# Altium PCB PCB.PcbDoc
Units mm, origin at the board's own origin, x right, y up, seen from the top; angles counter-clockwise.
Board outline 152.4 x 101.6 mm, 2 copper layers (Top Layer, Bottom Layer); 32 components, 25 nets, 123 pads, 0 vias.
Unrouted connection lines stored in the file: 8.
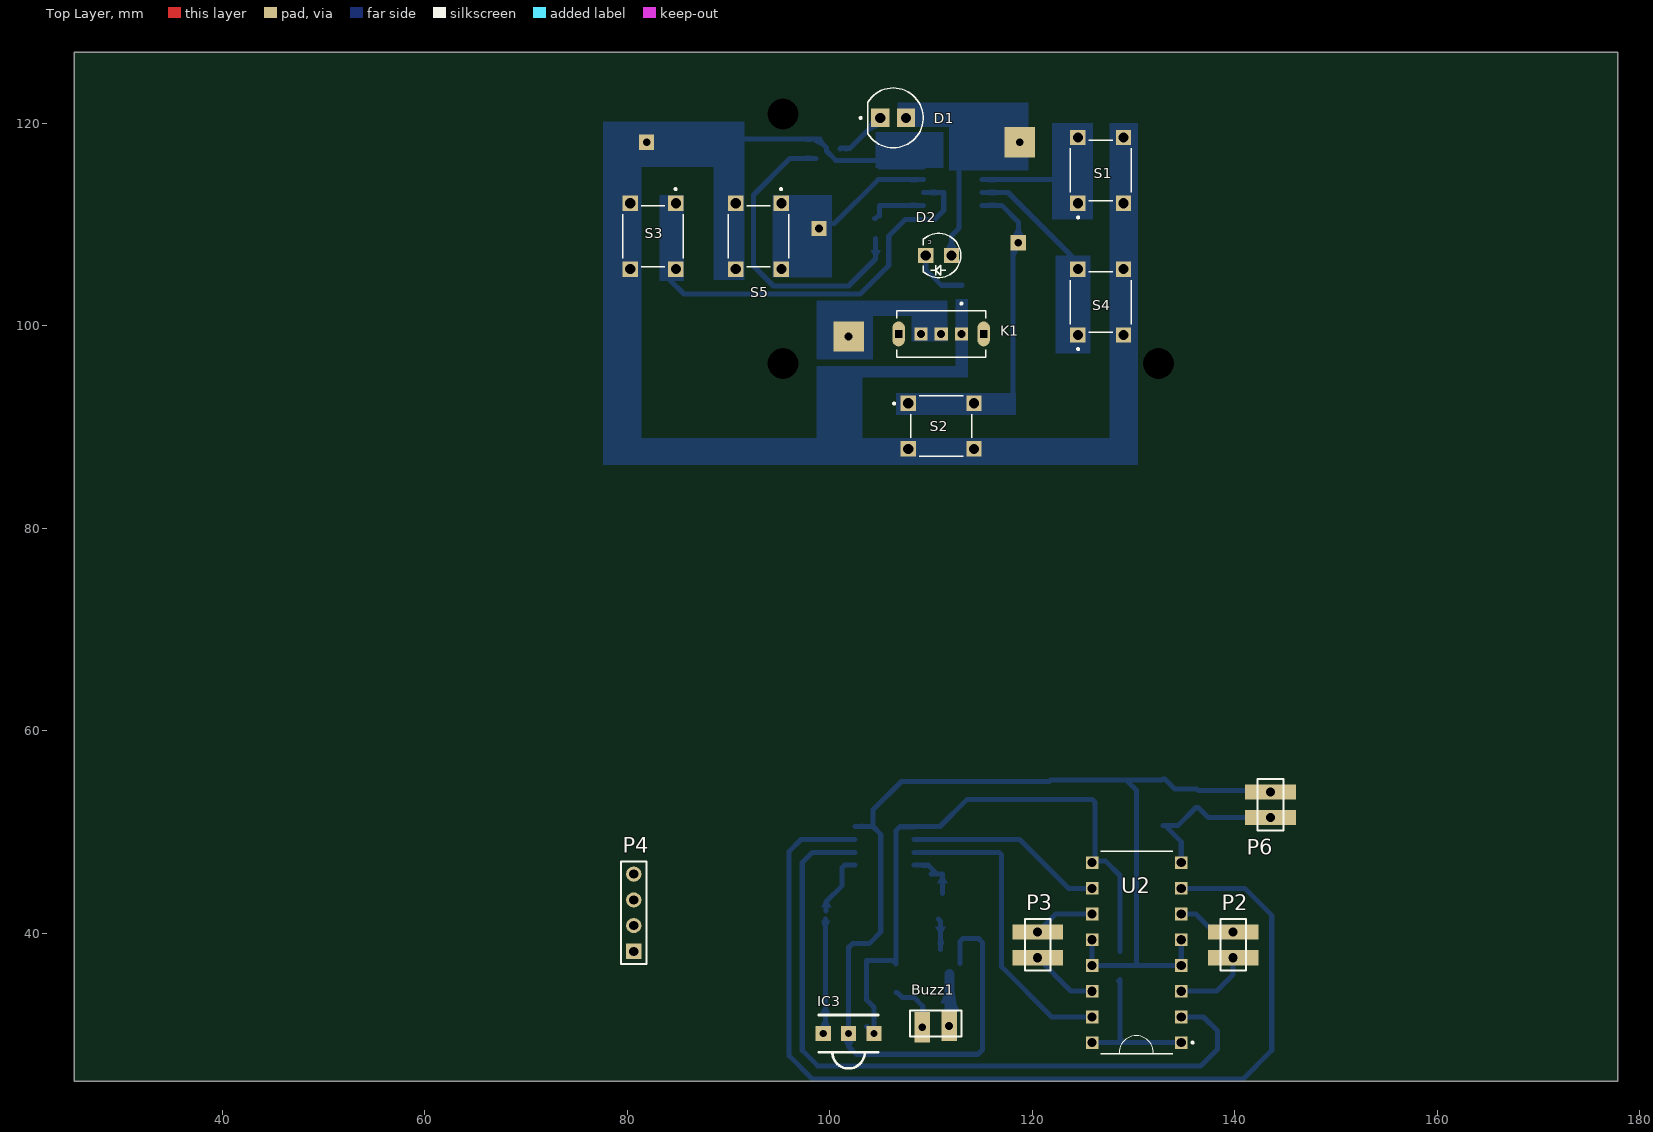
[diagram p0: Top Layer view]
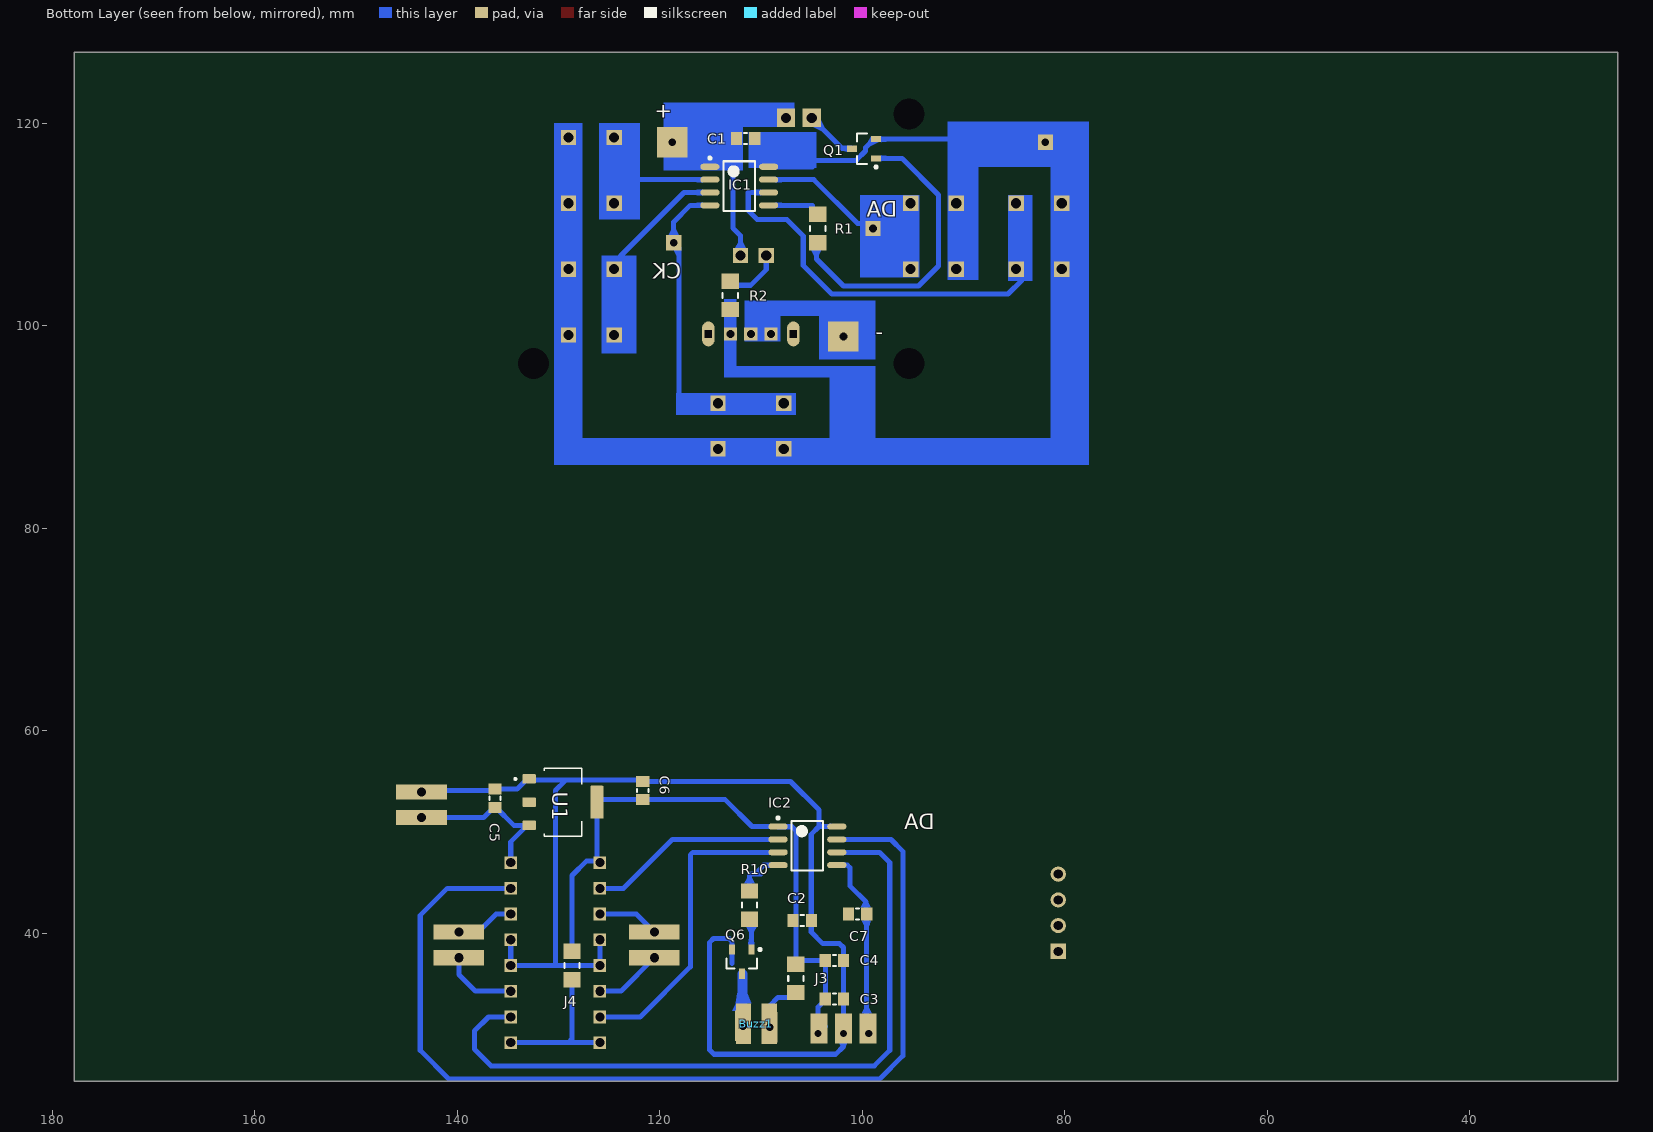
[diagram p1: Bottom Layer view, seen from below]
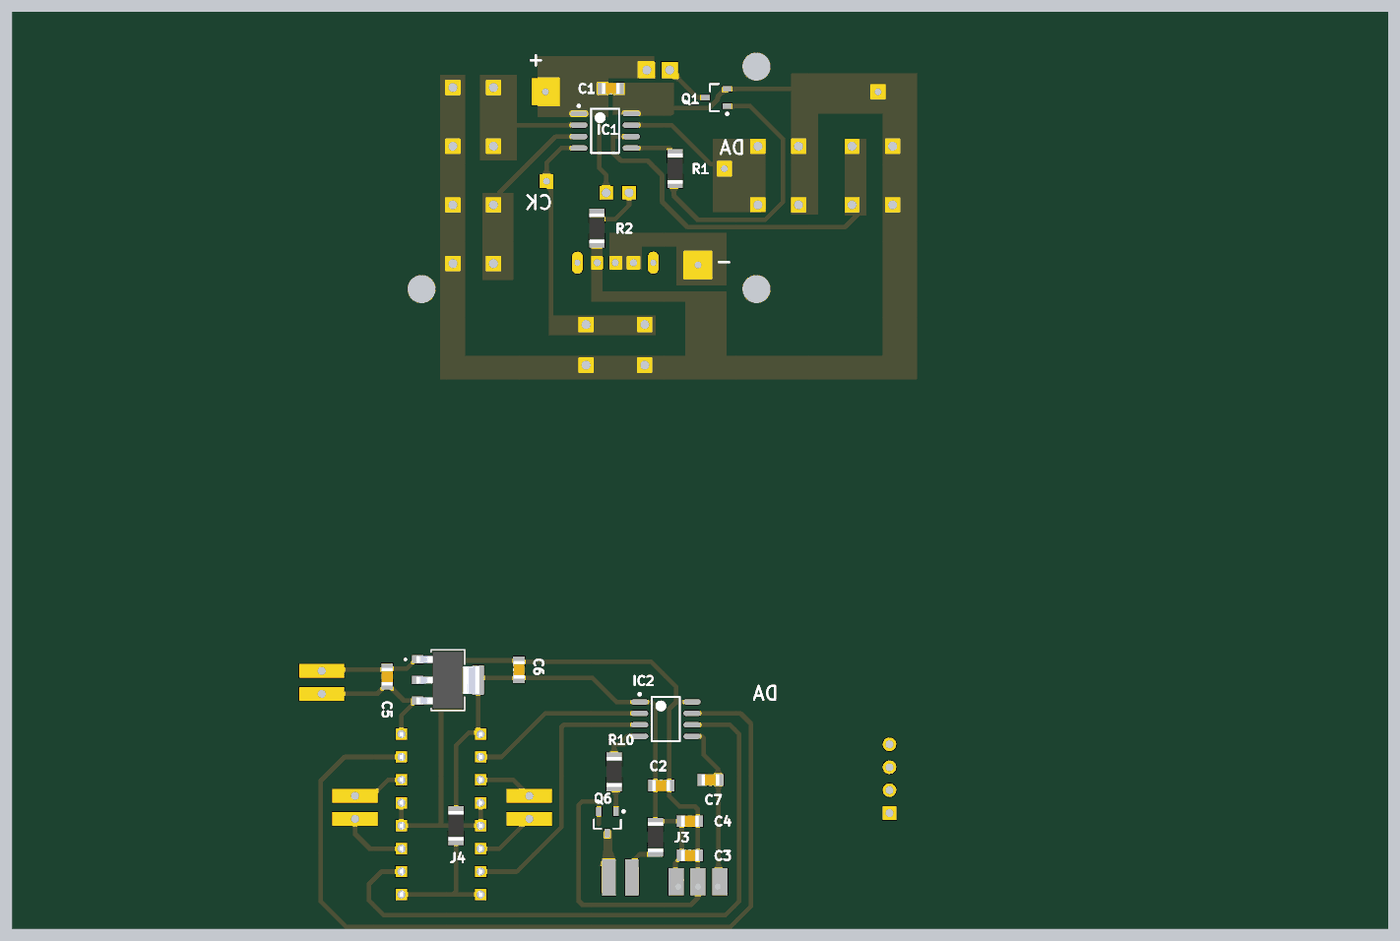
[diagram p2: 3D render of the assembled board from below, using the file's embedded part models]

## Layer stack, top to bottom
Top Solder: solder mask 0.0102, Solder Resist, Dk 3.5
Top Layer: signal copper 0.0356
Dielectric 1: dielectric 0.32, FR-4, Dk 4.8
Bottom Layer: signal copper 0.0356
Bottom Solder: solder mask 0.0102, Solder Resist, Dk 3.5

## Board outline
25.4,25.4 177.8,25.4 177.8,127 25.4,127

## Design rules (kind name [scope] priority, off if disabled: settings)
Clearance [All] p1: gap=0.3 ignorepadtopadclearanceinfootprint=FALSE
PolygonConnect [All] p1: connectstyle=Relief reliefconductorwidth=0.254 reliefentries=4 polygonreliefangle="90 Angle" airgapwidth=0.254
RoutingVias [All] p1: holewidth=0.711 width=1.27 viastyle="Through Hole" minholewidth=0.711 minwidth=1.27 maxholewidth=0.711 maxwidth=1.27
SolderMaskExpansion [All] p1: expansion=0.102
Width [All] p1: maxlimit=1 minlimit=0.254 preferedwidth=0.5
30 further rules are at their usual default settings.

## Classes and differential pairs
component class Sheet1: Buzz1 C1 C2 C3 C4 C5 C6 D1 IC1 IC2 IC3 P2 P3 P4 P6 Q1 Q6 R1 R10 S1 S2 S3 S4 S5 U1

## Components (designator, comment, footprint, x,y, rotation, side; value= is the part's Value field where it differs from the comment)
Buzz1 "Header 2" HDR1X2#1 109.18,31.097 r0 top
C1 "Capacitor" CAPC2012X08N-805 111.506,118.491 r180 bottom value=100n
C2 "Capacitor" CAPC2012X08N-805 105.918,41.275 r180 bottom value=100n
C3 "Capacitor" CAPC2012X08N-805 102.743,33.528 r180 bottom value=100u
C4 "Capacitor" CAPC2012X08N-805 102.743,37.338 r180 bottom value=100n
C5 "Capacitor" CAPC2012X08N-805 136.271,53.34 r270 bottom value=100n
C6 "Capacitor" CAPC2012X08N-805 121.666,54.102 r270 bottom value=100u
C7 "Capacitor" CAPC2012X08N-805 100.457,41.91 r180 bottom value=100n
D1 "L08R5000Q1" LEDRD254W57D500H1070 106.252,120.523 r0 top
D2 "Comment" LED-3MM-ROUND 110.744,106.934 r180 top
IC1 "HT66f002" ht66f002 112.141,113.792 r180 bottom
IC2 "HT66f002" ht66f002 105.41,48.641 r180 bottom
IC3 "VS838" VS838 101.854,30.099 r90 top
J3 "Resistor" RESC3216X08N-1206 106.553,35.56 r90 bottom value=1k
J4 "Resistor" RESC3216X08N-1206 128.651,36.83 r270 bottom value=1k
K1 "Comment" SW_SS12D07VG4 110.998,99.187 r180 top
P2 "Header 2" HDR1X2#2 139.827,37.592 r90 top
P3 "Header 2" HDR1X2#2 120.523,40.132 r270 top
P4 "Header 4" HDR1X4 80.645,38.227 r90 top
P6 "Header 2" HDR1X2#2 143.51,51.435 r90 top
Q1 "c945" c945 99.822,117.475 r0 bottom
Q6 "NPN" MMBT8050 111.887,37.211 r270 bottom
R1 "Resistor" RESC3216X08N-1206 104.394,109.601 r270 bottom value=1K
R2 "Resistor" RESC3216X08N-1206 113.03,102.997 r270 bottom value=1K
R10 "Resistor" RESC3216X08N-1206 111.125,42.799 r270 bottom value=1k
S1 "TS04-66-95-BK-100-SMT" SW_TS02-66-43-BK-160-SCR-D 126.746,115.339 r90 top
S2 "TS04-66-95-BK-100-SMT" SW_TS02-66-43-BK-160-SCR-D 110.998,90.091 r0 top
S3 "TS04-66-95-BK-100-SMT" SW_TS02-66-43-BK-160-SCR-D 82.55,108.839 r270 top
S4 "TS04-66-95-BK-100-SMT" SW_TS02-66-43-BK-160-SCR-D 126.746,102.339 r90 top
S5 "TS04-66-95-BK-100-SMT" SW_TS02-66-43-BK-160-SCR-D 92.964,108.839 r270 top
U1 "AMS1117" SOT229P700X180-4N 129.54,52.959 r180 bottom
U2 "L293D" DIP880W50P254L2000H510Q16 130.302,38.1 r180 top

## Footprints (in the part's own frame and the unit in brackets; to place one, negate y for a bottom-side part, rotate by r counter-clockwise, add the part's x,y. Pads: shape width x height; smd on the part's side, far side on the other; paste and mask are expansions set on the pad)
c945 [mm] "SOT23, 3-Leads, Body 2.90x2.45mm, Pitch 0.95mm, IPC Medium Density"
  rect 1x0.6 smd: B(-1.2,0.95) C(1.2,0) E(-1.2,-0.95)
  silkscreen extent -1.32,-1.5 0.7,1.92, body extent -0.7,-1.5 0.7,1.5, height 1.1
CAPC2012X08N-805 [mm] "Chip Capacitor, 2-Leads, Body 2.00x1.25mm, IPC Medium Density"
  rect 1.1x1.3 smd: 1(-0.9,0) 2(0.9,0)
  silkscreen extent -0.15,-0.55 0.15,0.55, body extent -1,-0.63 1,0.63, height 0.8
DIP880W50P254L2000H510Q16 [mm]
  rect 1.25x1.25 / inner round 1.25 / far side rect 1.25x1.25 hole 0.9: 1(-4.4,8.89)
  rect 1.25x1.25 hole 0.9: 2(-4.4,6.35) 3(-4.4,3.81) 4(-4.4,1.27) 5(-4.4,-1.27) 6(-4.4,-3.81) 7(-4.4,-6.35) 8(-4.4,-8.89) 9(4.4,-8.89) 10(4.4,-6.35) 11(4.4,-3.81) 12(4.4,-1.27) 13(4.4,1.27) 14(4.4,3.81) 15(4.4,6.35) 16(4.4,8.89)
  silkscreen extent -5.63,-10 3.55,10, body extent -4.62,-10 4.62,10, height 5.1
HDR1X2#1 [mm] "Connector; Header; 2 Position"
  rect 1.5x4 smd far side: 1(0,0) 2(2.54,0)
  silkscreen extent -1.27,-1.27 3.81,1.27
HDR1X2#2 [mm] "Connector; Header; 2 Position"
  rect 1.5x5 hole 0.9: 1(0,0) 2(2.54,0)
  silkscreen extent -1.27,-1.27 3.81,1.27
HDR1X4 [mm] "Connector; Header; 4 Position"
  rect 1.5x1.5 hole 0.9: 1(0,0)
  round 1.5 hole 0.9: 2(2.54,0) 3(5.08,0) 4(7.62,0)
  silkscreen extent -1.27,-1.27 8.89,1.27
ht66f002 [mm] "SOIC, 8-Leads, Body 4.90x3.90mm, Pitch 1.27mm, IPC Medium Density"
  oval 1.9x0.6 smd: 1(-2.9,1.905) 2(-2.9,0.635) 3(-2.9,-0.635) 4(-2.9,-1.905) 5(2.9,-1.905) 6(2.9,-0.635) 7(2.9,0.635) 8(2.9,1.905)
  silkscreen extent -3.03,-2.45 1.55,2.88, body extent -1.95,-2.45 1.95,2.45, height 1.75
LED-3MM-ROUND [mm]
  rect 1.508x1.508 hole 1: 1(1.27,0) 2(-1.27,0)
  silkscreen extent -2.19,-2.19 1.5,2.19
LEDRD254W57D500H1070 [mm]
  rect 1.815x1.815 hole 1: A(1.27,0) C(-1.27,0)
  silkscreen extent -3.3,-2.96 2.96,2.96
MMBT8050 [mm] "SOT23, 3-Leads, Body 2.90x2.45mm, Pitch 0.95mm, IPC Medium Density"
  rect 1x0.6 smd: 1(-1.2,0.95) 2(-1.2,-0.95) 3(1.2,0)
  silkscreen extent -1.32,-1.5 0.7,1.92, body extent -0.7,-1.5 0.7,1.5, height 1.1
RESC3216X08N-1206 [mm] "Chip Resistor, 2-Leads, Body 3.20x1.60mm, IPC Medium Density"
  rect 1.5x1.7 smd: 1(-1.4,0) 2(1.4,0)
  silkscreen extent -0.25,-0.75 0.25,0.75, body extent -1.65,-0.85 1.65,0.85, height 0.8
SOT229P700X180-4N [mm]
  rrect15% 1.31x0.93 smd: 1(-3.345,2.29) 2(-3.345,0) 3(-3.345,-2.29)
  rrect15% 1.31x3.24 smd: 4(3.345,0)
  silkscreen extent -4.8,-3.36 1.86,3.36, body extent -3.5,-3.25 3.5,3.25, height 1.8
SW_SS12D07VG4 [mm]
  rect 1.308x1.308 hole 0.8: 1(-2,0) 2(0,0) 3(2,0)
  oval 1.23x2.46 hole 0.7 square: S1(-4.2,0) S2(4.2,0)
  silkscreen extent -4.4,-3.1 4.4,2.3
SW_TS02-66-43-BK-160-SCR-D [mm]
  rect 1.508x1.508 / inner round 1.508 / far side rect 1.508x1.508 hole 1: 1(-3.25,2.25)
  rect 1.508x1.508 hole 1: 2(-3.25,-2.25) 3(3.25,2.25) 4(3.25,-2.25)
  silkscreen extent -4.75,-3 3,3
VS838 [mm]
  rect 1.5x1.5 hole 0.7: 1(0,2.5) 2(0,0) 3(0,-2.5)
  silkscreen extent -3.44,-2.95 1.84,2.95, body extent -3.42,-2.54 1.38,2.54, height 11

## Part data
Buzz1 P2 P3 P6: "Header, 2-Pin", LatestRevisionDate=17-Jul-2002, LatestRevisionNote="Re-released for DXP Platform.", Publisher="Altium Limited"
C1 C2 C3 C4 C5 C6 C7: "Standard Bipolar Capasitor"
D1: "LED, Orange, Through Hole, T-1 3/4 (5mm), 30 mA, 2.1 V, 635 nm", Package=None, Availability=Unavailable, MP=L08R5000Q1, Price=None
J3 J4 R1 R2 R10: "Standard Resistor"
P4: "Header, 4-Pin", LatestRevisionDate=17-Jul-2002, LatestRevisionNote="Re-released for DXP Platform.", Publisher="Altium Limited"
Q6: library part MMBT8050
S1 S2 S3 S4 S5: "6 x 6 mm, 4.3~9.5 mm Actuator Height, 100~260 gf, Surface Mount, SPST, Tactile Switch", Package=None, Availability="In Stock", Check_prices=https://www.snapeda.com/parts/TS04-66-95-BK-100-SMT/CUI+Devices/view-part/?ref=eda, CUI_purchase_URL=https://www.cuidevices.com/product/switches/tactile-switches/ts04-series?utm_source=snapeda.com&utm_medium=referral&utm_campaign=snapedaBOM, MF="CUI Devices", MP=TS04-66-95-BK-100-SMT, Price=None, Purchase-URL=https://pricing.snapeda.com/search/part/TS04-66-95-BK-100-SMT/?ref=eda, SnapEDA_Link=https://www.snapeda.com/parts/TS04-66-95-BK-100-SMT/CUI+Devices/view-part/?ref=snap
U1: "1A LOW DROPOUT VOLTAGE REGULATOR SOT-223", Package="SOT-223 Seeed Technology", Availability="Not in stock", Check_prices=https://www.snapeda.com/parts/AMS1117/Advanced+Monolithic+Systems/view-part/?ref=eda, MF="Advanced Monolithic Systems", MP=AMS1117, Price=None, SnapEDA_Link=https://www.snapeda.com/parts/AMS1117/Advanced+Monolithic+Systems/view-part/?ref=snap
U2: "Bipolar Motor Driver - Parallel 16-PowerDIP", Package="DIP-16 STMicroelectronics", Availability="In Stock", Check_prices=https://www.snapeda.com/parts/L293D/STMicroelectronics/view-part/?ref=eda, MF=STMicroelectronics, MP=L293D, Price=None, Purchase-URL=https://pricing.snapeda.com/search/part/L293D/?ref=eda, SnapEDA_Link=https://www.snapeda.com/parts/L293D/STMicroelectronics/view-part/?ref=snap

## Free pads (board coordinates)
  round 1.524 hole 3.1: 2(132.461,96.266) 3(95.377,96.266) 4(95.377,120.904)
  rect 1.524x1.524 hole 0.762: 5(118.618,108.204) 7(98.933,109.601)
  rect 3x3 hole 0.762: 6(118.745,118.11) 22(101.854,98.933)
  rect 1.5x1.5 hole 0.762: 8(81.915,118.11)
  rect 1.7x3 smd far side: 19(104.267,30.607) 20(101.854,30.607) 21(99.441,30.607)
  rect 1.524x3 hole 0.762: 25(109.122,30.734) 26(111.778,30.861)

## Nets (pads, with @x,y where several pads share a name; then routed paths per layer and width w, separated by ;. In a path a pad name is that pad's centre, name@x,y a point inside that pad or via, vN(x,y) a via of type N, cw(c..) or ccw(c..) an arc to the next point about the centre after c; other vN are vias at no path point)
5v: Buzz1.1 C2.1 C3.1 C4.1 C6.2 C7.1 IC2.1 IC3.3 J3.1 J3.2 J4.1 J4.2 P4.1 pad.19 pad.25 U1.2 U1.4 U2.1 U2.9 U2.16 | length 83.1
  Bottom Layer w0.5: IC3.3@103.632,30.821 IC3.3 104.354,32.717 103.643,33.428 C3.1 C4.1 106.175,37.338 J3.2 106.553,50.165 106.915,50.527 108.291,50.527 IC2.1 110.871,50.546 113.527,53.202 C6.2 125.952,53.202 U1.4 126.195,47.486 125.902,47.193 U2.9 126.046,47.134 127.177,47.134 127.207,47.164 128.651,45.72 J4.1 ; J3.1 106.653,34.16 107.153,33.66 108.326,33.66 109.18,32.806 Buzz1.1 ; U2.16 129.032,29.21 ; J4.2@128.524,35.303 J4.2 128.651,29.591 129.032,29.21 ; U2.1 129.032,29.21
C1: IC2.7 P4.4 U2.7 | length 100.3
  Bottom Layer w0.5: IC2.7 97.155,49.276 95.984,48.105 95.984,27.91 98.268,25.626 140.815,25.626 143.637,28.448 143.637,41.783 140.97,44.45 U2.7
C2: IC2.6 U2.2 | length 72.5
  Bottom Layer w0.5: IC2.6 98.298,48.006 97.282,46.99 97.282,28.448 98.806,26.924 136.652,26.924 138.303,28.575 138.303,30.353 136.906,31.75 U2.2
C3: IC2.4 P4.3 R10.1 | length 5.7
  Bottom Layer w0.5: IC2.4 109.728,46.736 110.617,45.847 ; 109.982,45.847 110.617,45.847 ; R10.1@111.125,43.942 R10.1 111.125,45.847 110.617,45.847
C4: IC2.2 U2.10 | length 19.6
  Bottom Layer w0.5: IC2.2 118.745,49.276 123.571,44.45 U2.10
C5: IC2.3 U2.15 | length 30.8
  Bottom Layer w0.5: IC2.3 116.713,48.006 116.967,47.752 116.967,36.703 121.92,31.75 U2.15
ICPCK: IC1.4 pad.5 S2.1 S2.3 | length 22.5
  Bottom Layer w0.5: IC1.4 116.967,111.887 118.618,110.236 pad.5 118.106,107.692 118.106,92.706 117.729,92.329
ICPDA: IC1.7 pad.7 S5.1 S5.3 | length 13.3
  Bottom Layer w0.5: 98.421,108.796 98.421,109.089 pad.7 99.445,110.113 100.461,110.113 104.775,114.427 IC1.7
key_1: IC1.2 S1.1 S1.3 | length 10.4
  Bottom Layer w0.5: IC1.2 122.158,114.427 S1.1
key_3: IC1.6 S3.1 S3.3 | length 38.1
  Bottom Layer w0.5: S3.3 84.582,105.371 84.582,104.648 84.205,104.648 84.201,104.644 84.201,104.521 85.598,103.124 102.997,103.124 105.823,105.95 105.823,108.871 107.442,110.49 110.363,110.49 111.252,111.379 111.252,113.157 IC1.6
key_4: IC1.3 S4.1 S4.3 | length 13
  Bottom Layer w0.5: IC1.3 117.602,113.157 123.869,106.89 123.869,106.216 S4.3
NetBuzz1_2: Buzz1.2 pad.26 Q6.3 | length 5.7
  Bottom Layer w0.5: pad.26@111.76,30.353 pad.26@111.837,30.43 ; Q6.3@111.837,35.961 Q6.3
  Bottom Layer w1: pad.26@111.837,30.43 Q6.3@111.837,35.961
NetD1_C: D1.C Q1.C | length 5.2
  Bottom Layer w0.5: Q1.C 101.072,117.525 101.984,117.525 D1.C
NetIC1_5: IC1.5 R1.1 | length 5.8
  Bottom Layer w0.5: R1.1@104.394,110.601 104.528,110.601 R1.1@104.778,110.851 ; R1.1@104.905,110.851 104.905,111.851 104.941,111.887 IC1.5
NetP2_1: P2.1 U2.3 | length 7.5
  Bottom Layer w0.5: U2.3 138.176,34.29 139.827,35.941 P2.1
NetP2_2: P2.2 U2.6 | length 5.9
  Bottom Layer w0.5: U2.6 136.144,41.91 137.922,40.132 P2.2
NetP3_1: P3.1 U2.11 | length 6.1
  Bottom Layer w0.5: P3.1 122.301,41.91 U2.11
NetP3_2: P3.2 U2.14 | length 6.7
  Bottom Layer w0.5: P3.2 123.825,34.29 U2.14
NetQ1_B: Q1.B R1.2 | length 30.7
  Bottom Layer w0.5: Q1.B 96.078,116.525 92.456,112.903 92.456,105.902 94.434,103.924 101.854,103.924 104.521,106.591 R1.2@104.521,108.601
NetQ6_1: Q6.1 R10.2 | length 3.1
  Bottom Layer w0.5: R10.2@110.744,41.402 110.937,41.209 Q6.1
SIG: C7.2 IC2.5 IC3.1 pad.21 | length 17.7
  Bottom Layer w0.5: IC3.1 99.568,30.313 C7.2@99.568,41.402 ; C7.2@99.632,42.227 99.632,43.116 101.219,44.704 101.219,46.482 101.473,46.736 IC2.5
V+: C1.1 D1.A IC1.1 pad.6 | length 9.3
  Bottom Layer w0.5: 112.014,106.934 112.014,108.891 112.776,109.653 112.776,115.697 112.903,115.824
V++: C5.2 P6.1 U1.3 U2.8 | length 17
  Bottom Layer w0.5: U1.3 U1.3@133.075,50.669 ; U2.8 134.702,49.042 U1.3@133.075,50.669 ; P6.1@144.399,51.435 137.376,51.435 136.371,52.44 C5.2 136.171,52.44 134.4,50.669 U1.3@133.075,50.669
V-: C1.2 IC1.8 pad.8 Q1.E S1.2 S1.4 S2.2 S2.4 S3.2 S3.4 S4.2 S4.4 S5.2 S5.4 | length 33.1
  Bottom Layer w0.5: 84.836,118.364 84.897,118.425 Q1.E 98.822,118.425 99.666,117.581 99.666,117.253 100.587,116.332 105.791,116.332 ; 104.902,115.697 107.812,115.697 ; IC1.8 107.812,115.697 ; C1.2 110.606,118.391 110.306,118.091 110.206,118.091 107.812,115.697 ; 112.998,99.187 112.998,101.854
V--: C2.2 C3.2 C4.2 C5.1 C6.1 IC2.8 IC3.2 P4.2 P6.2 pad.20 Q6.2 U1.1 U2.4 U2.5 U2.12 U2.13 | length 131.4
  Bottom Layer w0.5: C4.2 C4.2@101.843,37.438 ; IC2.8 IC2.8@103.074,50.546 ; IC2.8@103.12,50.592 IC2.8@103.074,50.546 ; 112.837,37.023 Q6.2 112.837,39.177 113.157,39.497 114.681,39.497 115.062,39.116 115.062,28.487 114.642,28.067 102.616,28.067 101.854,28.829 IC3.2 pad.20 101.854,33.528 101.854,37.338 101.854,38.608 102.235,38.989 103.886,38.989 105.029,40.132 105.029,41.275 105.029,49.784 104.267,50.546 ; U2.12 U2.13 130.302,36.83 ; U2.5 U2.4 130.302,36.83 ; P6.2@144.399,53.975 144.266,54.108 136.403,54.108 C5.1 134.084,54.24 133.075,55.249 U1.1 132.765,55.129 129.286,55.129 ; IC2.8@103.074,50.546 104.267,50.546 ; 104.267,50.546 104.267,52.197 107.072,55.002 C6.1 121.793,55.129 129.286,55.129 ; 129.286,55.129 130.302,54.113 130.302,36.83
pads on no net: D2.1 D2.2 K1.1 K1.2 K1.3 K1.S1 K1.S2 R2.1 R2.2
copper on no net: | length 5.6
  Bottom Layer w0.5: 109.474,106.934 109.474,105.537 111.014,103.997 113.03,103.997

## Polygon pours and split planes (outlines as drawn)
no net on Bottom Layer "Bottom Layer-No Net" (solid, pour order 0): 132.334,100.076

## Other copper
Bottom Layer:
  rectangle net V-: 98.679,88.011 103.251,96.012
  rectangle net V-: 99.06,94.869 113.665,96.012
  rectangle net V-: 112.395,94.869 113.665,102.616
  rectangle: 98.679,96.647 104.267,101.6
  rectangle: 98.679,100.965 111.633,102.489
  rectangle: 108.077,98.425 111.633,102.362
  rectangle net key_4: 122.301,97.282 125.73,106.934
  rectangle net V-: 88.519,104.521 91.567,120.142
  rectangle net V-: 77.597,115.697 91.567,120.142
  rectangle net V-: 77.597,86.36 81.407,120.142
  rectangle net ICPCK: 106.553,91.186 118.364,93.345
  rectangle net V-: 77.597,86.233 130.302,88.9
  rectangle net V-: 127.635,86.233 130.429,120.015
  rectangle net key_1: 121.92,110.49 125.984,120.015
  rectangle net V-: 104.521,115.57 111.252,119.126
  rectangle net key_3: 83.185,104.394 85.598,112.903
  rectangle net ICPDA: 94.361,104.775 100.203,112.903
  rectangle net V+: 106.68,119.634 119.634,122.047
  rectangle net V+: 111.76,115.316 119.634,122.047

## Silkscreen, mask and mechanical layers (free items; w line width, h text height)
Top Overlay:
Bottom Overlay:
  text "+" at 118.745,120.523 h1.52
  text "DA" at 96.52,110.744 h1.52
  text "CK" at 117.856,104.648 h1.52
  text "-" at 97.917,98.679 h1.52
  text "DA" at 92.837,50.292 h1.52
Mechanical 1:
  lines w0.254: 75.565,84.201 75.565,123.571 136.398,123.571 136.398,84.201 75.565,84.201 ; 89.916,24.13 89.916,57.15 146.939,57.15 146.939,24.13 89.916,24.13

## Text inside footprints (layer, text, board x,y; h text height)
D2: Top Overlay "C" at 110.044,108.434 h0.41 r180